# Altium PCB ir-kh.PcbDoc
Units mm, origin at the board's own origin, x right, y up, seen from the top; angles counter-clockwise.
Board outline 151 x 86.38 mm, 2 copper layers (Top Layer, Bottom Layer); 29 components, 21 nets, 70 pads, 0 vias.
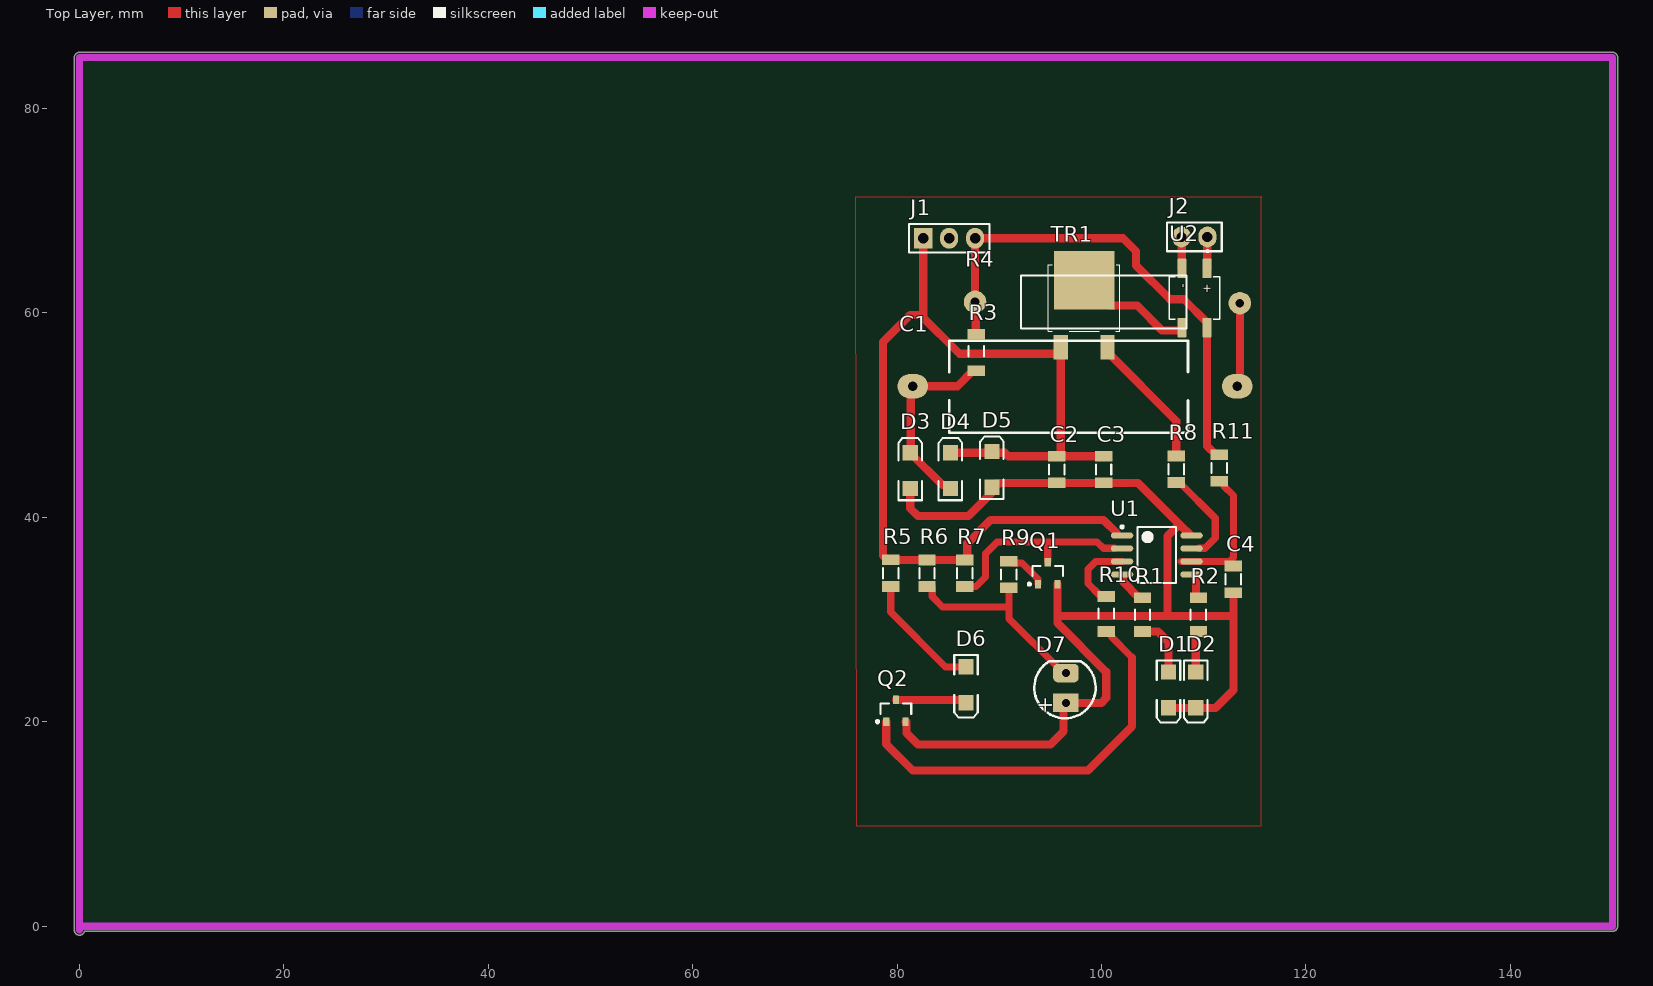
[diagram p0: Top Layer view]
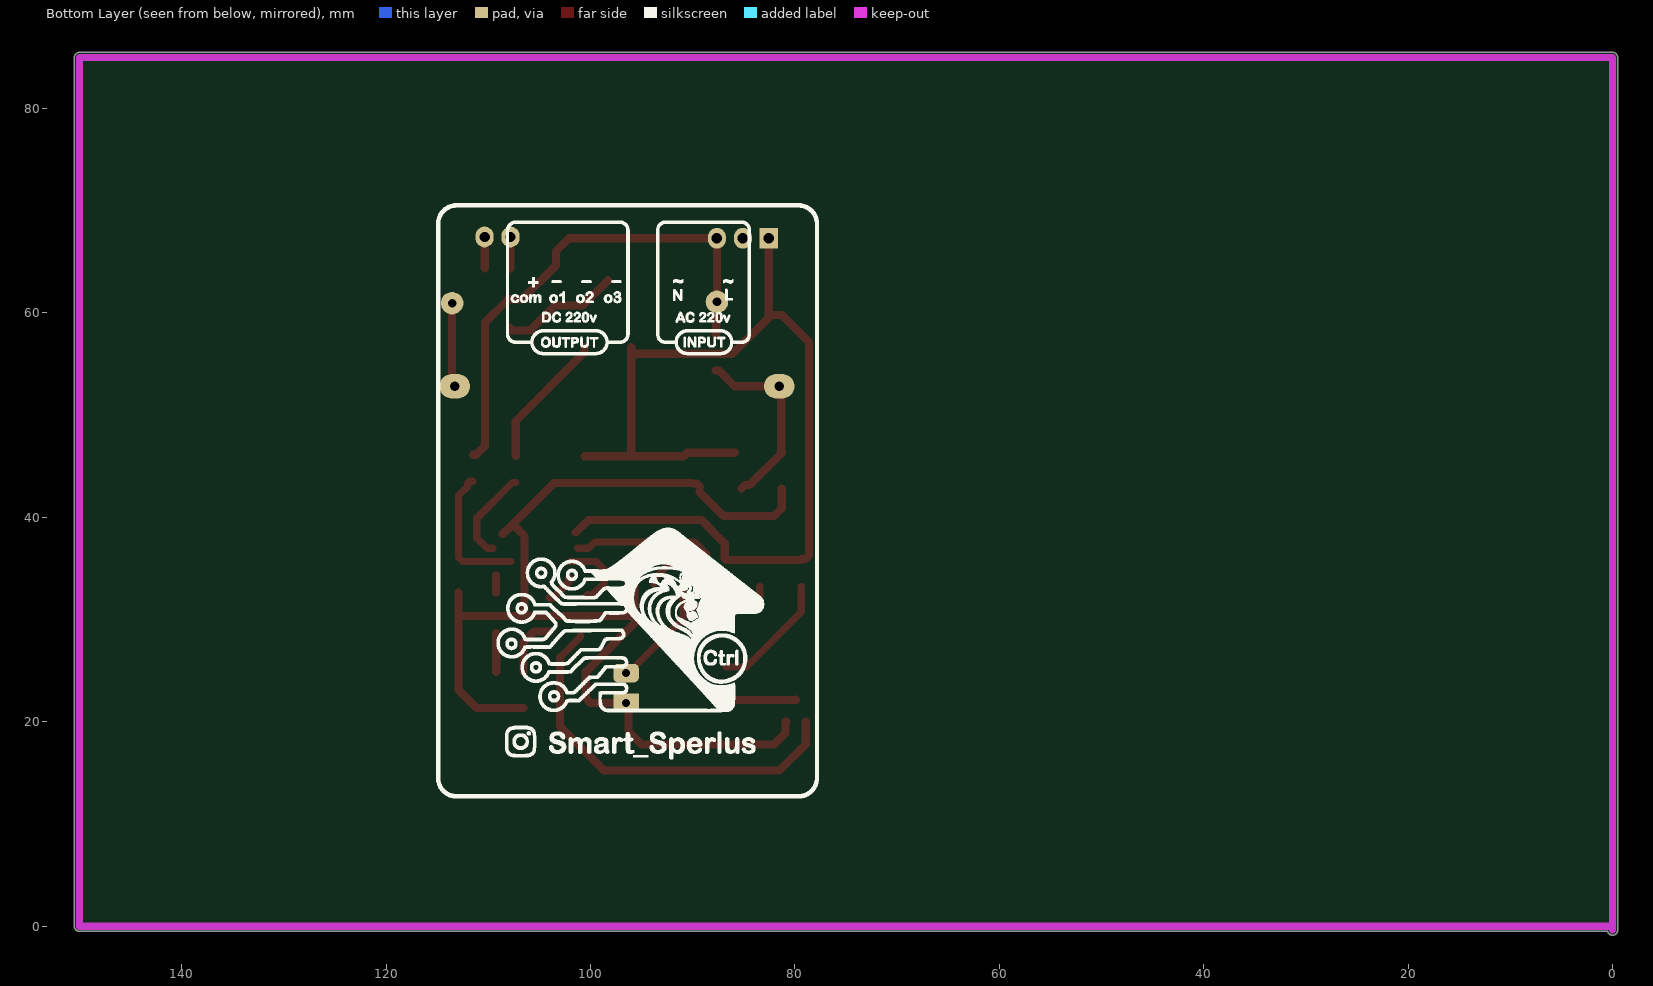
[diagram p1: Bottom Layer view, seen from below]
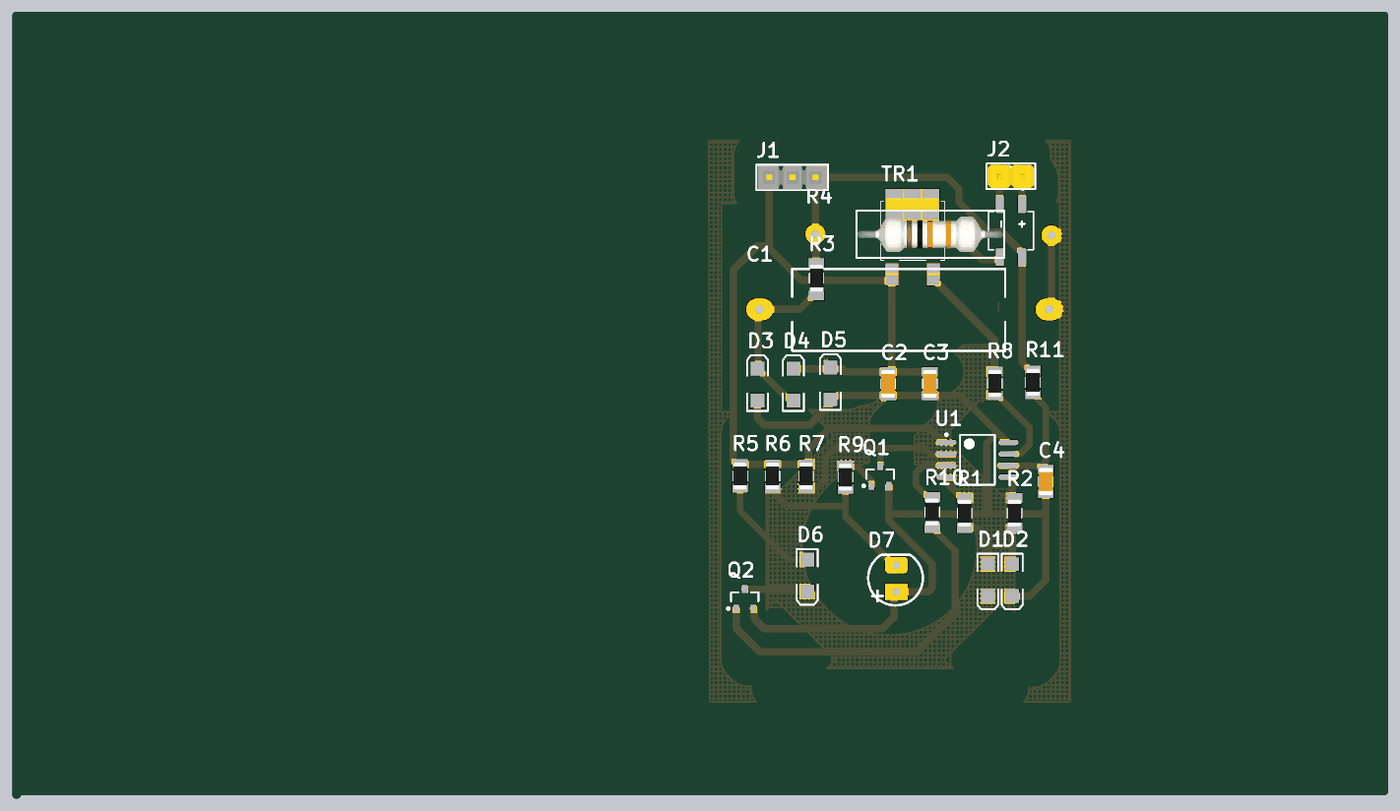
[diagram p2: 3D render of the assembled board from above, using the file's embedded part models]

## Layer stack, top to bottom
Top Solder: solder mask 0.0102, Solder Resist, Dk 3.5
Top Layer: signal copper 0.0356
Dielectric 1: dielectric 0.32, FR-4, Dk 4.8
Bottom Layer: signal copper 0.0356
Bottom Solder: solder mask 0.0102, Solder Resist, Dk 3.5

## Board outline
-0.5,-0.381 -0.5,85 cw(c0,85) 0,85.5 150,85.5 cw(c150,85) 150.5,85 150.5,0 cw(c150,0) 150,-0.5 0.486,-0.5 cw(c0,-0.381)

## Design rules (kind name [scope] priority, off if disabled: settings)
Clearance Clearance_1 [InPolygon] p1: gap=1 ignorepadtopadclearanceinfootprint=FALSE
Clearance [All] p2: gap=0.6 ignorepadtopadclearanceinfootprint=FALSE
PolygonConnect [All] p1: connectstyle=Relief reliefconductorwidth=0.254 reliefentries=4 polygonreliefangle="90 Angle" airgapwidth=0.254
RoomDefinition ir-kh [InComponentClass('ir-kh')] p1: confinementstyle=ConfineIn formatcopy=TRUE lockcomponents=FALSE outline 144.907,-4.953 247.904,-4.953 247.904,23.114 144.907,23.114
RoutingLayers [All] p1: top layer_v5=FALSE bottom layer_v5=TRUE
RoutingVias [All] p1: holewidth=0.711 width=2.5 viastyle="Through Hole" minholewidth=0.711 minwidth=1.27 maxholewidth=0.711 maxwidth=2
SolderMaskExpansion [All] p1: expansion=0.102 istentingtop=FALSE
Width [All] p1: maxlimit=3 minlimit=0.5 preferedwidth=1
29 further rules are at their usual default settings.

## Components (designator, comment, footprint, x,y, rotation, side; value= is the part's Value field where it differs from the comment)
C1 "1uf 400v" "1uf 400v" 109.093,57.277 r180 top value=1uF
C2 "=Value" "CAP 1206" 95.631,44.704 r270 top
C3 "=Value" "CAP 1206" 100.203,44.704 r270 top
C4 "=Value" "CAP 1206" 112.903,33.909 r90 top
D1 "LED2" 3.2X1.6X1.1 106.553,23.114 r270 top
D2 "LED2" 3.2X1.6X1.1 109.22,23.114 r270 top
D3 "D Tunnel1" 3.2X1.6X1.1 81.28,44.577 r90 top
D4 "D Tunnel1" 3.2X1.6X1.1 85.217,44.577 r90 top
D5 "D Tunnel1" 3.2X1.6X1.1 89.281,44.704 r90 top
D6 "LED2" 3.2X1.6X1.1 86.741,23.622 r270 top
D7 "MODEL" LED-5mm 96.52,23.241 r180 top
J1 "Header3X1" "HEADER 3X1" 82.55,67.31 r0 top
J2 "Header2X1" "Header 2X1" 109.093,67.437 r0 top
Q1 "QNPN" SOT-23B_L 94.742,34.544 r90 top
Q2 "QNPN" SOT-23B_L 79.883,21.082 r90 top
R1 "10K" "RES 1206 (3216X08L)"#1 104.013,30.48 r270 top
R2 "10K" "RES 1206 (3216X08L)"#2 109.474,30.48 r270 top
R3 "10K" "RES 1206 (3216X08L)"#3 87.757,56.261 r270 top
R4 "10K" Res-(2/1) 90.932,61.087 r0 top
R5 "10K" "RES 1206 (3216X08L)"#4 79.375,34.544 r90 top
R6 "10K" "RES 1206 (3216X08L)"#4 82.931,34.544 r270 top
R7 "10K" "RES 1206 (3216X08L)"#4 86.614,34.544 r270 top
R8 "10K" "RES 1206 (3216X08L)"#4 107.315,44.704 r270 top
R9 "10K" "RES 1206 (3216X08L)"#4 90.932,34.417 r90 top
R10 "10K" "RES 1206 (3216X08L)"#5 100.457,30.607 r270 top
R11 "10K" "RES 1206 (3216X08L)"#4 111.506,44.831 r270 top
TR1 "BT136S-600D" SOT428 98.298,61.468 r0 top
U1 "ATtiny15L-1SC" 8S2_N 105.41,36.322 r0 top
U2 "MB6S" SOIC245P670X270-4N 109.093,61.468 r270 top

## Footprints (in the part's own frame and the unit in brackets; to place one, negate y for a bottom-side part, rotate by r counter-clockwise, add the part's x,y. Pads: shape width x height; smd on the part's side, far side on the other; paste and mask are expansions set on the pad)
"1uf 400v" [mm] "24*9mm"
  oval 3x2.4 hole 0.9: 1(-4.191,4.445) 2(27.559,4.445)
  silkscreen extent 0.63,0 24,9
3.2X1.6X1.1 [mm] "SMT LED; 2 Flat Leads"
  rect 1.5x1.5 smd: 1(-1.75,0) 2(1.75,0)
  silkscreen extent -2.9,-1.15 3.2,1.15
8S2_N [mm] "SOP, 8-Leads, Body 5.3x5.3mm, Pitch 1.27mm, IPC Medium Density"
  oval 2.2x0.6 smd: 1(-3.4,1.905) 2(-3.4,0.635) 3(-3.4,-0.635) 4(-3.4,-1.905) 5(3.4,-1.905) 6(3.4,-0.635) 7(3.4,0.635) 8(3.4,1.905)
  silkscreen extent -3.52,-2.75 1.9,2.88, body extent -2.73,-2.75 2.73,2.75, height 2.16
"CAP 1206" [mm]
  rect 1.05x1.7 smd: 1(-1.27,0) 2(1.326,0)
  silkscreen extent -0.47,-0.75 0.53,0.75, body extent -1.49,-0.77 1.55,0.75, height 0.75
"Header 2X1" [mil]
  oval 70x80 hole 40: 1(-50,0) 2(50,0)
  silkscreen extent -105,-55 105,55, body extent -100,-50 100,50, height 374
"HEADER 3X1" [mil]
  rect 70x80 hole 40: 1(0,0)
  oval 70x80 hole 40: 2(100,0) 3(200,0)
  silkscreen extent -55,-55 255,55, body extent -49,-50 251,50, height 330
LED-5mm [mm] "LED; 2 Leads"
  rect 2.5x1.8 hole 0.8: 1(0,1.397)
  rrect50% 2.5x1.8 hole 0.8: 2(0,-1.524)
  silkscreen extent -2.91,-2.67 3.09,2.9
"RES 1206 (3216X08L)"#1 [mm] "Chip Resistor, 2-Leads, Body 3.2x1.6mm, IPC High Density _ (0.125 W)"
  rect 1.05x1.7 smd: 1(-1.651,0) 2(1.651,0)
  silkscreen extent -0.5,-0.75 0.5,0.75, body extent -1.52,-0.76 1.53,0.76, height 0.6
"RES 1206 (3216X08L)"#2 [mm] "Chip Resistor, 2-Leads, Body 3.2x1.6mm, IPC High Density _ (0.125 W)"
  rect 1.05x1.7 smd: 1(-1.651,0.015) 2(1.651,0.015)
  silkscreen extent -0.5,-0.75 0.5,0.75, body extent -1.52,-0.76 1.53,0.76, height 0.6
"RES 1206 (3216X08L)"#3 [mm] "Chip Resistor, 2-Leads, Body 3.2x1.6mm, IPC High Density _ (0.125 W)"
  rect 1.05x1.7 smd: 1(-1.651,0) 2(1.905,0)
  silkscreen extent -0.5,-0.75 0.5,0.75, body extent -1.52,-0.76 1.53,0.76, height 0.6
"RES 1206 (3216X08L)"#4 [mm] "Chip Resistor, 2-Leads, Body 3.2x1.6mm, IPC High Density _ (0.125 W)"
  rect 1.05x1.7 smd: 1(-1.295,0) 2(1.301,0)
  silkscreen extent -0.5,-0.75 0.5,0.75, body extent -1.52,-0.76 1.53,0.76, height 0.6
"RES 1206 (3216X08L)"#5 [mm] "Chip Resistor, 2-Leads, Body 3.2x1.6mm, IPC High Density _ (0.125 W)"
  rect 1.05x1.7 smd: 1(-1.651,0) 2(1.778,0)
  silkscreen extent -0.5,-0.75 0.5,0.75, body extent -1.52,-0.76 1.53,0.76, height 0.6
Res-(2/1) [mm]
  round 2.2 hole 0.85: 1(-3.302,0) 2(22.606,-0.127)
  silkscreen extent 1.2,-2.6 17.4,2.6, body extent 1.28,-1.98 17.32,1.92, height 7.03
SOIC245P670X270-4N [mm]
  rrect23% 1.91x0.91 smd: 1(-2.9,1.225) 2(-2.9,-1.225) 3(2.9,-1.225) 4(2.9,1.225)
  silkscreen extent -4.68,-2.48 2.1,2.48
SOT428 [mm]
  rect 1.4x2.4 smd paste-2: 1(-2.285,-4.8) 3(2.285,-4.8)
  rect 5.9x5.75 smd paste-4: MB(0,1.725)
  silkscreen extent -3.5,-3.25 3.5,3.25
SOT-23B_L [mm] "SOT23, 3-Leads, Body 2.9x1.3mm, Pitch 0.95mm, Lead Span 2.4mm, IPC High Density"
  rect 0.85x0.6 smd: 1(-1.075,0.95) 2(-1.075,-0.95) 3(1.075,0)
  silkscreen extent -1.2,-1.5 0.7,1.92, body extent -0.7,-1.5 0.7,1.5, height 1.14

## Part data
C1: "Capacitor 24*9mm", ComponentLinkURL=www.picpars.com, Designer="Seyed Mohsen Ghasemain"
C2 C3 C4: library part Capacitor, "Capacitor"
D1 D2 D6: "Typical RED, GREEN, YELLOW, AMBER GaAs LED", LatestRevisionDate=17-Jul-2002, LatestRevisionNote="Re-released for DXP Platform.", PackageDescription="SM LED; 2 Flat Leads", PackageReference=3.2X1.6X1.1, PackageVersion=Feb-2002, Published=8-Jun-2000, Publisher="Altium Limited"
D3 D4 D5: "Tunnel Diode - RLC Model", LatestRevisionDate=17-Jul-2002, LatestRevisionNote="Re-released for DXP Platform.", PackageDescription="SM LED; 2 Flat Leads", PackageReference=3.2X1.6X1.1, PackageVersion=Feb-2002, Published=8-Jun-2000, Publisher="Altium Limited"
D7: library part "LED 5mm", "Typical LED", COLOR=RED
Q1 Q2: "NPN Bipolar Transistor", LatestRevisionDate=29-May-2009, LatestRevisionNote="IPC-7351 Footprint Added.", PackageDescription="3-Pin SOT-23 Package 0.95 mm Pitch, 2.4 mm Lead Span", PackageReference=SOT-23B, PackageVersion=Aug-1999, Published=8-Jun-2000, Publisher="Altium Limited"
R1 R2 R3 R4 R5 R6 R7 R8 R9 R10 R11: library part Resistor, "Resistor", Power="1/4 W", Tolerance=5%
TR1: "TRIAC 600V 27A 3-Pin(2+Tab) DPAK", Package=None, Check_prices=https://www.snapeda.com/parts/BT136S-600D/BitFenix+Co.+Ltd./view-part/?ref=eda, MF="WeEn Semiconductor(Hong Kong)Co.,Limited", MP=BT136S-600D, SnapEDA_Link=https://www.snapeda.com/parts/BT136S-600D/BitFenix+Co.+Ltd./view-part/?ref=snap
U1: "8-Bit AVR Microcontroller with 1K Byte of Flash Memory", Supplier Part Number 1=ATTINY15L-1SC-ND, ComponentLink1Description=Datasheet, ComponentLink1URL=http://www.atmel.com/dyn/resources/prod_documents/doc1187.pdf, ComponentLink2Description="Atmel.com Home", ComponentLink2URL=http://www.atmel.com, DatasheetVersion=1187E-AVR-06/02, LatestRevisionDate=16-Oct-2006, LatestRevisionNote="IPC-7351 Footprint Added.", PackageDescription="8-Lead, 0.208\" Body, Plastic Small Outline Package (EIAJ)", PackageReference=8S2, PackageVersion="revF, Apr-2008", Published=17-Sep-2003, Publisher="Altium Limited", Supplier 1=Digi-Key, Supplier 2=Mouser, Supplier Part Number 2=556-ATTINY15L1SC
U2: "Bridge Rectifier Single Phase Standard 600V Surface Mount 4-SOIC", Package="BESOP-4 Surge Components", Digi-Key_Part_Number=MB6SCT-ND, Digi-Key_Purchase_URL=https://www.digikey.com.tr/product-detail/en/on-semiconductor/MB6S/MB6SCT-ND/965654?utm_source=snapeda&utm_medium=aggregator&utm_campaign=symbol, MF="ON Semiconductor", MP=MB6S, SnapEDA_Link=https://www.snapeda.com/parts/MB6S/ON%20Semiconductor/view-part/2774209/?ref=snap

## Nets (pads, with @x,y where several pads share a name; then routed paths per layer and width w, separated by ;. In a path a pad name is that pad's centre, name@x,y a point inside that pad or via, vN(x,y) a via of type N, cw(c..) or ccw(c..) an arc to the next point about the centre after c; other vN are vias at no path point)
GND: C2.2 C3.2 C4.1 D1.2 D2.2 D3.1 D5.1 D7.1 Q1.2 Q2.2 U1.8 | length 113.5
  Top Layer w0.8: Q2.2 80.908,20.007 80.933,19.982 80.933,18.889 82.042,17.78 94.996,17.78 96.286,19.07 96.286,21.344 96.786,21.844 99.988,21.844 100.457,22.313 100.457,24.892 95.692,29.657 95.692,30.353 ; D3.1 81.28,40.894 82.042,40.132 86.995,40.132 D5.1@89.34,42.477 ; D5.1 89.631,43.304 90.026,43.304 90.1,43.378 C2.2 C3.2 102.926,43.378 ; Q1.2 95.692,30.353 ; 103.251,43.378 103.576,43.378 107.838,39.116 ; D1.2 D2.2 111.153,21.364 112.903,23.114 112.903,30.353 ; U1.8@108.593,38.362 107.838,39.116 ; C4.1 112.903,31.069 112.903,30.353 ; 95.692,30.353 95.693,30.354 106.444,30.354 ; 106.444,30.354 106.444,38.158 107.402,39.116 107.838,39.116 ; 106.444,30.354 110.753,30.354 110.754,30.353 112.903,30.353
ir-r: Q1.3 R7.2 U1.2 | length 19.6
  Top Layer w0.7: R7.2@86.106,33.243 R7.2 ; 87.503,33.243 87.726,33.243 88.646,34.163 88.646,36.449 89.789,37.592 94.742,37.592 ; Q1.3@94.742,35.698 94.742,37.592 ; U1.2@101.26,36.977 100.183,36.977 99.568,37.592 94.742,37.592
ir-t: R10.1 U1.3 | length 7.3
  Top Layer w0.7: R10.1 100.282,32.433 99.774,32.433 98.679,33.528 98.679,34.925 99.421,35.667 101.99,35.667 U1.3
l1: R2.1 U1.5 | length 1.7
  Top Layer w0.8: R2.1@109.243,32.645 U1.5@109.243,34.317
l2: R1.1 U1.4 | length 2.9
  Top Layer w0.8: 102.108,34.036 102.108,33.711 103.688,32.131 R1.1
NetC1_1: C1.1 R4.2 | length 6.8
  Top Layer w0.8: 113.538,54.119 R4.2
NetC1_2: C1.2 D3.2 D4.1 R3.2 | length 18.9
  Top Layer w0.8: D4.1 84.867,43.177 84.43,43.177 D3.2 81.343,46.391 81.343,52.642 C1.2 85.908,52.832 87.432,54.356 R3.2
NetD1_1: D1.1 R1.2 | length 5.9
  Top Layer w0.8: R1.2 105.537,28.829 106.553,27.813 D1.1
NetD6_1: D6.1 R5.1 | length 12.1
  Top Layer w0.7: R5.1 79.375,30.734 84.737,25.372 D6.1
NetD6_2: D6.2 Q2.3 | length 7
  Top Layer w0.8: Q2.3 79.908,22.132 86.481,22.132 D6.2
NetD7_2: D7.2 R6.2 R9.1 | length 19.5
  Top Layer w0.7: R6.2@83.439,33.243 83.439,32.258 84.455,31.242 90.932,31.242 ; R9.1 90.932,31.242 ; D7.2@96.212,24.819 96.212,25.05 96.009,25.253 95.778,25.253 90.932,30.099 90.932,31.242
NetJ2_1: J2.1 U2.2 | length 3.1
  Top Layer w0.8: J2.1 107.845,67.415 107.845,64.391 U2.2
NetJ2_2: J2.2 U2.1 | length 3.1
  Top Layer w0.8: U2.1 110.34,64.39 110.34,67.414 J2.2
NetQ1_2: Q1.1 R9.2 | length 3.7
  Top Layer w0.7: R9.2@91.282,35.543 92.219,35.543 93.792,33.97 Q1.1
NetQ2_2: Q2.1 R10.2 | length 38.8
  Top Layer w0.7: R10.2@100.965,28.448 100.965,28.321 102.997,26.289
  Top Layer w0.8: Q2.1 78.933,17.841 81.534,15.24 98.679,15.24 102.997,19.558 102.997,26.289
NetR8_1: R8.1 TR1.3 | length 13.5
  Top Layer w0.8: TR1.3 100.583,56.168 107.315,49.436 R8.1
NetTR1_MB: TR1.MB U2.3 | length 11.8
  Top Layer w0.8: TR1.MB 100.773,60.718 103.493,60.718 105.918,58.293 107.813,58.293 107.868,58.348 U2.3
nol: J1.3 R3.1 R4.1 R11.1 U2.4 | length 50
  Top Layer w0.8: R3.1 87.694,57.975 87.694,61.023 R4.1 J1.3 102.108,67.31 103.378,66.04 103.378,64.643 106.68,61.341 108.045,61.341 110.318,59.068 U2.4 110.318,46.989 111.181,46.126 R11.1
out: R8.2 U1.7 | length 9.2
  Top Layer w0.7: R8.2 107.64,43.403 111.125,39.918 111.125,37.974 110.128,36.977 U1.7@109.56,36.977
vcc: C2.1 C3.1 D4.2 D5.2 J1.1 R5.2 R6.1 R7.1 TR1.1 U1.1 | length 100.4
  Top Layer w0.8: R5.2 R6.1@82.926,35.845 ; R5.2@79.375,35.941 78.954,35.941 78.613,36.282 78.613,57.15 81.28,59.817 82.55,59.817 J1.1 ; 82.296,59.817 86.106,56.007 TR1.1@96.013,56.007 ; R6.1 86.743,35.839 86.868,35.964 86.868,37.465 89.154,39.751 100.203,39.751 U1.1@101.442,38.512 ; D4.2@85.852,46.327 89.281,46.327 90.551,46.327 90.901,45.977 91.367,45.977 91.37,45.974 96.013,45.974 C2.1@96.393,45.974 ; TR1.1 TR1.1@96.013,56.007 ; C3.1@100.584,45.974 97.536,45.974 C2.1@96.393,45.974 ; TR1.1@96.013,56.007 96.013,46.354 96.174,46.193 C2.1@96.393,45.974
zero: C4.2 R11.2 U1.6 | length 13.5
  Top Layer w0.7: U1.6@107.794,35.687 107.804,35.677 112.493,35.677 112.903,36.087 112.903,42.133 112.006,43.03 112.006,43.355 111.831,43.53 R11.2
pads on no net: D2.1 J1.2 R2.2
copper on no net: | length 3.8
  Top Layer w0.8: 109.22,24.864 109.22,28.702

## Polygon pours and split planes (outlines as drawn)
GND on Top Layer "NONET_L01_P024" (hatched 90Degree grid 0.5 track 0.2, shelved, pour order 24): 75.946,71.374 115.697,71.374 115.57,71.247 115.57,9.779 76.073,9.779

## Keep-outs
Keep-Out Layer:
  lines w0.7: 0,-0.381 0,85 150,85 150,0 0,0

## Silkscreen, mask and mechanical layers (free items; w line width, h text height)
Bottom Overlay:
  drawing of 14186 lines, arcs and shapes, not listed
Bottom Solder:
  lines w0.2: 76.454,11.557 76.454,71.374 116.332,71.374 116.332,11.557 76.454,11.557

## Text inside footprints (layer, text, board x,y; h text height)
D7: Top Overlay "+" at 93.853,22.479 h1.52 r270
U2: Top Overlay "-" at 107.693,62.868 h0.81 r270; Top Overlay "+" at 109.983,62.867 h0.81 r270